# EAGLE board videopac_cart_V1.1 (EAGLE 7.5.0)
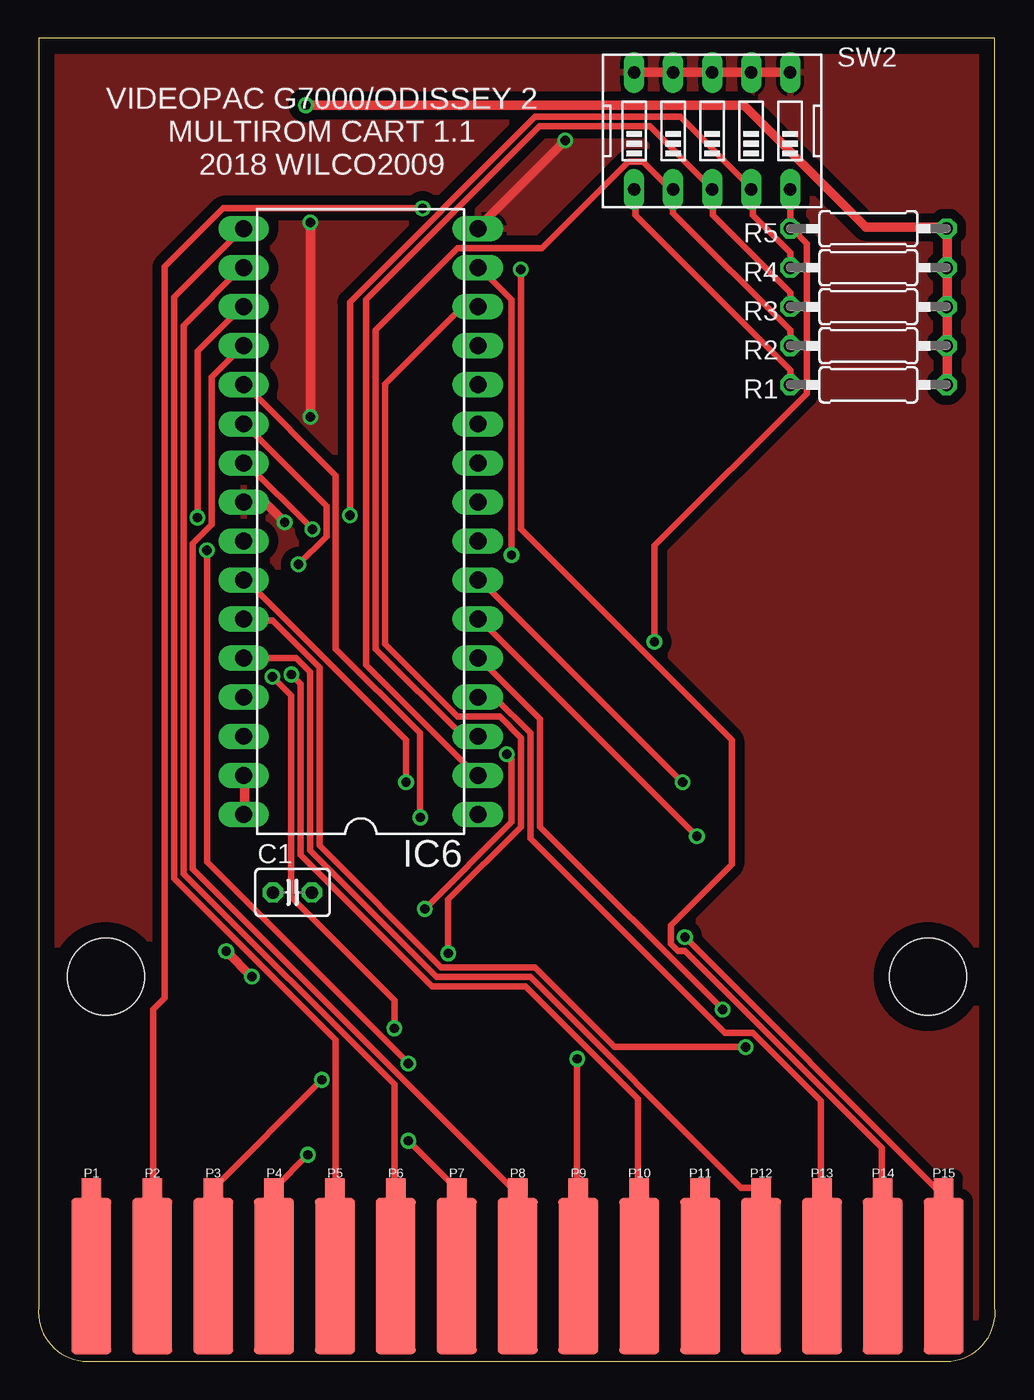
[diagram p0: board, top side]
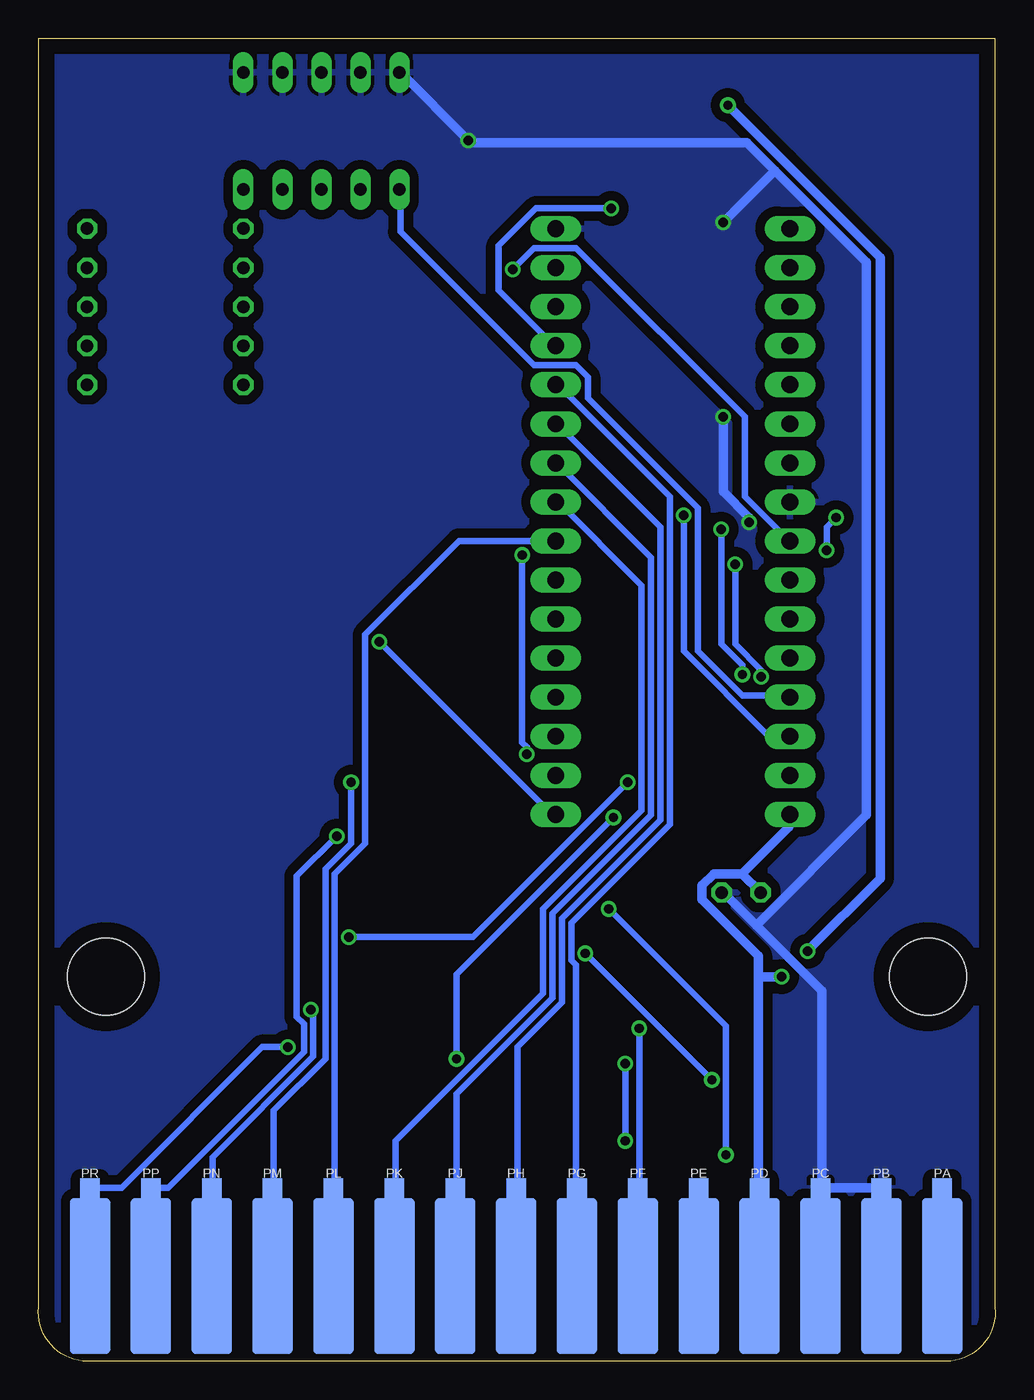
[diagram p1: board, bottom side, seen from below]

Size 62.24 x 86.03 mm. Coordinates in mm from the lower left corner, seen from the top.
Outline: 0.02,86.03 0.02,3.5 arc90 2.88,0 59.36,0 arc90 62.23,3.5 62.23,86.03 0.02,86.03
Copper layers (1*16): Top 0.035mm / dielectric 1.5mm / Bottom 0.035mm
Design rules "default *": minimum track width 16mil, minimum drill 24mil, track to track 8mil, track to pad 8mil, pad to pad 8mil, via to via 8mil, smd to smd 8mil, copper to edge 40mil, drill to drill 8mil, minimum pad ring 10mil, minimum via ring 8mil, stop-mask expansion 4mil, vias tented up to drill 0mil, thermal gap 10mil
Net classes: 0 default: width 0.406 mm; 1 power: width 0.61 mm
Holes 5 mm at 4.38,25 57.86,25

## Footprints (pad centres in the part's own frame; a part is rotated, then mirrored left to right if it is on the bottom)
C025-030X050 = drill 0.813 octagon: 1 -1.27,0; 2 1.27,0
DIL32 = drill 1.1 long: 1 -21.59,-8.89; 2 -19.05,-8.89; 3 -16.51,-8.89; 4 -13.97,-8.89; 5 -11.43,-8.89; 6 -8.89,-8.89; 7 -6.35,-8.89; 8 -3.81,-8.89; 9 -1.27,-8.89; 10 1.27,-8.89; 11 3.81,-8.89; 12 6.35,-8.89; 13 8.89,-8.89; 14 11.43,-8.89; 15 13.97,-8.89; 16 16.51,-8.89; 17 16.51,6.35; 18 13.97,6.35; 19 11.43,6.35; 20 8.89,6.35; 21 6.35,6.35; 22 3.81,6.35; 23 1.27,6.35; 24 -1.27,6.35; 25 -3.81,6.35; 26 -6.35,6.35; 27 -8.89,6.35; 28 -11.43,6.35; 29 -13.97,6.35; 30 -16.51,6.35; 31 -19.05,6.35; 32 -21.59,6.35
0207/10 = drill 0.813 octagon: 1 -5.08,0; 2 5.08,0
EDG-05 = drill 0.813 long: 1 -5.08,-3.81; 2 -2.54,-3.81; 3 0,-3.81; 4 2.54,-3.81; 5 5.08,-3.81; 6 5.08,3.81; 7 2.54,3.81; 8 0,3.81; 9 -2.54,3.81; 10 -5.08,3.81
VIDEOPAC = smd 1.27 x 1.27: 1 -27.683,6.167; 2 -23.723,6.167; 3 -19.763,6.167; 4 -15.803,6.167; 5 -11.843,6.167; 6 -7.883,6.167; 7 -3.923,6.167; 8 0.037,6.167; 9 3.997,6.167; 10 7.957,6.167; 11 11.917,6.167; 12 15.877,6.167; 13 19.837,6.167; 14 23.797,6.167; 15 27.757,6.167 | smd 1.27 x 1.27 bottom: A -27.683,6.167; B -23.723,6.167; C -19.763,6.167; D -15.803,6.167; E -11.843,6.167; F -7.883,6.167; G -3.923,6.167; H 0.037,6.167; J 3.997,6.167; K 7.957,6.167; L 11.917,6.167; M 15.877,6.167; N 19.837,6.167; P 23.797,6.167; R 27.757,6.167 | smd 2.6 x 10.16: P$1 -27.683,0.452; P$2 -23.723,0.452; P$3 -19.763,0.452; P$4 -15.803,0.452; P$5 -11.843,0.452; P$6 -7.883,0.452; P$7 -3.923,0.452; P$8 0.037,0.452; P$9 3.997,0.452; P$10 7.957,0.452; P$11 11.917,0.452; P$12 15.877,0.452; P$13 19.837,0.452; P$14 23.797,0.452; P$15 27.757,0.452 | smd 2.6 x 10.16 bottom: P$A -27.683,0.452; P$B -23.723,0.452; P$C -19.763,0.452; P$D -15.803,0.452; P$E -11.843,0.452; P$F -7.883,0.452; P$H -3.923,0.452; P$J 0.037,0.452; P$K 3.997,0.452; P$L 7.957,0.452; P$M 11.917,0.452; P$N 15.877,0.452; P$P 19.837,0.452; P$R 23.797,0.452; P$S 27.757,0.452

## Placement (x,y rotation side)
C1  [C025-030X050]  16.53,30.48 0 top
IC6  29F040DIL32  [DIL32]  19.7,57.15 90 top
R1  [0207/10]  53.99,63.5 180 top
R2  [0207/10]  53.99,66.04 180 top
R3  [0207/10]  53.99,68.58 180 top
R4  [0207/10]  53.99,71.12 180 top
R5  [0207/10]  53.99,73.66 180 top
SW2  [EDG-05]  43.83,80.01 0 top
U$1  VIDEOPACEDGE  [VIDEOPAC]  31.13,5.08 0 top

## Library data of the parts
C1 R1-R5 = rcl
IC6 = Mio
SW2 = special
U$1 = BUSES

## Nets
GND [power]: C1.2 IC6.16 IC6.24 SW2.6 SW2.7 SW2.8 SW2.9 SW2.10 U$1.B U$1.C
N$1: IC6.12 U$1.G
N$2: IC6.11 U$1.H
N$3: IC6.10 U$1.J
N$4: IC6.9 U$1.K
N$5: IC6.8 U$1.L
N$6: IC6.7 U$1.M
N$7: IC6.6 U$1.P
N$8: IC6.5 U$1.N
N$9: IC6.27 U$1.R
N$10: IC6.26 U$1.15
N$11: IC6.23 U$1.10
N$12: IC6.25 U$1.14
N$13: IC6.4 U$1.13
N$14: IC6.28 U$1.12
N$15: IC6.29 R1.2 SW2.1
N$16: IC6.3 R2.2 SW2.2
N$17: IC6.2 R3.2 SW2.3
N$18: IC6.30 R4.2 SW2.4
N$19: IC6.1 R5.2 SW2.5
N$20: IC6.22 U$1.F
N$21: IC6.13 U$1.2
N$22: IC6.14 U$1.3
N$23: IC6.15 U$1.4
N$24: IC6.17 U$1.5
N$25: IC6.18 U$1.6
N$26: IC6.19 U$1.7
N$27: IC6.20 U$1.8
N$28: IC6.21 U$1.9
VCC [power]: C1.1 IC6.31 IC6.32 R1.1 R2.1 R3.1 R4.1 R5.1 U$1.D

## Tracks (layer width: path | path; a pad name or v marks a point on that pad's centre or on a via)
GND  (via drill 0.61)
  Top 0.61: SW2.10 SW2.9 SW2.8 SW2.7 SW2.6 | v34.28,79.4 28.64,73.76 IC6.16 | v16.02,54.56 14.65,55.93 13.43,55.93 IC6.24 | v17.69,74.07 v17.69,61.42
  Bottom 0.61: U$1.B 7.46,11.28 11.27,11.28 U$1.C 11.27,11.58 11.27,24.08 15.53,28.35 | 15.53,28.35 17.67,30.48 C1.2 | SW2.10 38.7,83.82 v34.28,79.4 34.13,79.25 16.14,79.25 14.33,77.43 | 15.53,28.35 8.37,35.51 8.37,71.48 14.33,77.43 | v16.02,54.56 16.02,54.86 17.69,56.54 v17.69,61.42 | 14.33,77.43 v17.69,74.07
  pour Bottom (isolate 0.61): 0.02,86.36 62.25,86.36 62.25,0 0.02,0
  pour Top (isolate 0.61): 0.02,86.36 62.25,86.36 62.25,0 0.02,0
N$1
  Bottom 0.406: U$1.G 27.27,11.28 27.27,25.76 27.57,26.06 27.57,28.5 21.17,34.9 21.17,56.24 28.49,63.55 IC6.12
N$2
  Bottom 0.406: U$1.H 31.08,11.28 31.08,20.42 28.18,23.32 28.18,28.8 21.78,35.2 21.78,54.25 28.49,60.96 IC6.11
N$3
  Bottom 0.406: U$1.J 35.04,11.28 35.04,17.37 28.79,23.62 28.79,29.11 22.39,35.51 22.39,52.27 28.49,58.37 IC6.10
N$4
  Bottom 0.406: U$1.K 39,11.28 39,14.33 29.4,23.93 29.4,29.41 23,35.81 23,50.44 28.49,55.93 IC6.9
N$5
  Bottom 0.406: IC6.8 34.89,53.34 40.99,47.24 40.99,33.68 42.97,31.7 42.97,11.28 U$1.L
N$6  (via drill 0.61)
  Top 0.406: v41.9,37.64 28.64,50.9 IC6.7
  Bottom 0.406: v41.9,37.64 41.9,33.68 43.58,32 43.58,19.66 46.93,16.31 46.93,11.28 U$1.M
N$7  (via drill 0.61)
  Top 0.406: v42.84,34.14 28.67,48.31 IC6.6
  Bottom 0.406: v42.84,34.14 45.43,31.55 45.43,22.4 44.97,21.95 44.97,20.12 53.81,11.28 54.88,11.28 U$1.P
N$8  (via drill 0.61)
  Top 0.406: v44.52,22.86 32.63,34.75 32.63,41.76 28.67,45.72 IC6.5
  Bottom 0.406: v44.52,22.86 44.36,22.71 44.36,19.81 50.92,13.26 50.92,11.28 U$1.N
N$9  (via drill 0.61)
  Top 0.406: v46.01,20.42 37.48,20.42 32.3,25.6 26.2,25.6 18.28,33.53 18.28,45.11 15.23,48.16 13.4,48.16 IC6.27
  Bottom 0.406: v46.01,20.42 47.69,20.42 56.84,11.28 58.82,11.28 U$1.R
N$10  (via drill 0.61)
  Top 0.406: v42.05,27.58 58.36,11.28 58.82,11.28 U$1.15 | v23.92,37.64 23.92,40.39 13.4,50.9 IC6.26
  Bottom 0.406: v42.05,27.58 33.98,27.58 v23.92,37.64
N$11  (via drill 0.61)
  Top 0.406: v16.45,44.65 17.06,44.04 17.06,32.92 25.59,24.38 31.69,24.38 39,17.07 39,11.28 U$1.10 | v17.82,54.1 13.4,58.52 IC6.23
  Bottom 0.406: v16.45,44.65 16.45,45.26 17.82,46.63 v17.82,54.1
N$12  (via drill 0.61)
  Top 0.406: v31.38,71.02 31.38,54.1 45.1,40.39 45.1,32.31 41.14,28.35 41.14,27.13 41.6,26.67 42.05,26.67 54.85,13.87 54.85,11.28 U$1.14
  Bottom 0.406: v31.38,71.02 30.01,72.39 27.27,72.39 16.3,61.42 16.3,56.24 13.4,53.34 IC6.25
N$13
  Top 0.406: U$1.13 50.89,11.28 50.89,16.92 46.47,21.34 44.64,21.34 31.99,33.98 31.99,40.84 29.71,43.13 28.64,43.13 IC6.4
N$14
  Top 0.406: IC6.28 16.75,45.72 17.67,44.81 17.67,33.22 25.9,24.99 31.99,24.99 45.71,11.28 46.93,11.28 U$1.12
N$15
  Top 0.406: R1.2 48.91,64.47 38.85,74.52 38.85,76.2 SW2.1
  Bottom 0.406: IC6.29 13.4,43.28 16.45,43.28 19.34,46.18 19.34,55.47 26.51,62.64 26.51,64.01 27.27,64.77 30.01,64.77 38.7,73.46 38.7,76.2 SW2.1
N$16
  Top 0.406: R2.2 48.91,67.06 41.29,74.68 SW2.2 41.14,76.2 39.31,78.03 38.39,78.03 32.76,72.39 27.27,72.39 21.94,67.06 21.94,46.33 27.57,40.69 28.49,40.69 IC6.3
N$17
  Top 0.406: R3.2 48.91,69.49 43.88,74.52 43.88,76.2 SW2.3 43.73,76.35 39.77,80.31 32.6,80.31 21.33,69.04 21.33,45.26 28.49,38.1 IC6.2
N$18  (via drill 0.61)
  Top 0.406: R4.2 48.91,72.08 46.47,74.52 46.47,76.2 SW2.4 46.32,76.35 41.75,80.92 32.3,80.92 20.26,68.89 v20.26,55.02
  Bottom 0.406: v20.26,55.02 20.26,46.18 14.77,40.69 13.4,40.69 IC6.30
N$19  (via drill 0.61)
  Top 0.406: SW2.5 R5.2 49.06,73.61 49.98,72.69 49.98,62.94 40.07,53.03 v40.07,46.79
  Bottom 0.406: v40.07,46.79 28.95,35.66 28.64,35.66 IC6.1
N$20  (via drill 0.61)
  Top 0.406: v23.15,21.64 23.15,23.47 16.45,30.18 16.45,43.28 v15.23,44.5 | v16.91,51.82 18.74,53.65 18.74,55.63 13.4,60.96 IC6.22
  Bottom 0.406: v23.15,21.64 23.15,11.28 U$1.F | v15.23,44.5 15.23,44.96 16.91,46.63 v16.91,51.82
N$21  (via drill 0.61)
  Top 0.406: v24.98,74.98 12.03,74.98 8.22,71.17 8.22,23.62 7.46,22.86 7.46,11.28 U$1.2
  Bottom 0.406: v24.98,74.98 29.86,74.98 32.3,72.54 32.3,69.65 28.64,65.99 IC6.13
N$22  (via drill 0.61)
  Top 0.406: v18.43,18.29 11.42,11.28 U$1.3 | v26.66,26.52 26.66,30.02 31.38,34.75 31.38,40.54 30.01,41.91 27.27,41.91 22.55,46.63 22.55,63.55 27.57,68.58 IC6.14
  Bottom 0.406: v26.66,26.52 v18.43,18.29
N$23  (via drill 0.61)
  Top 0.406: v17.52,13.41 15.38,11.28 U$1.4 | v25.14,29.41 30.77,35.05 30.77,39.17 v30.47,39.47 | v30.77,52.43 30.77,69.04 28.64,71.17 IC6.15
  Bottom 0.406: v17.52,13.41 17.52,21.79 v25.14,29.41 | v30.47,39.47 30.47,39.93 30.77,40.23 v30.77,52.43
N$24
  Top 0.406: U$1.5 19.34,11.28 19.34,20.88 8.83,31.39 8.83,69.19 13.25,73.61 IC6.17
N$25
  Top 0.406: U$1.6 23.15,11.28 23.15,17.98 9.44,31.7 9.44,67.36 13.25,71.17 IC6.18
N$26  (via drill 0.61)
  Top 0.406: v24.07,14.33 27.12,11.28 U$1.7 | v24.07,19.36 10.96,32.46 v10.96,52.73 | v10.35,54.86 10.35,65.68 13.25,68.58 IC6.19
  Bottom 0.406: v24.07,19.36 v24.07,14.33 | v10.96,52.73 10.96,54.25 v10.35,54.86
N$27
  Top 0.406: U$1.8 31.08,11.28 30.77,11.28 10.05,32 10.05,53.19 11.27,54.41 11.27,64.01 13.25,65.99 IC6.20
N$28  (via drill 0.61)
  Top 0.406: v35.04,19.66 35.04,11.28 U$1.9 | v24.83,35.36 24.83,40.84 19.34,46.33 19.34,57.61 13.4,63.55 IC6.21
  Bottom 0.406: v35.04,19.66 35.04,25.15 v24.83,35.36
VCC  (via drill 0.61)
  Top 0.61: R1.1 59.12,63.55 59.12,65.99 R2.1 59.12,66.29 59.12,68.58 R3.1 59.12,68.73 59.12,71.02 R4.1 59.12,71.32 59.12,73.61 R5.1 58.84,73.76 53.81,73.76 45.89,81.69 v17.39,81.69 | IC6.32 13.4,35.66 13.4,38.1 IC6.31 | v13.88,24.99 v12.21,26.67
  Bottom 0.61: 15.41,24.99 15.41,26.36 19.07,30.02 19.07,30.94 18.3,31.7 16.47,31.7 | 15.41,24.99 15.41,11.28 U$1.D | C1.1 16.47,31.7 | 16.47,31.7 13.43,34.75 13.43,35.51 IC6.32 | v17.39,81.69 7.48,71.78 7.48,31.39 v12.21,26.67 | 15.41,24.99 v13.88,24.99

## Text on the board
tPlace: VIDEOPAC G7000/ODISSEY 2 / MULTIROM CART 1.1 / 2018 WILCO2009